# EAGLE board iv25&power-center (EAGLE 7.3.0)
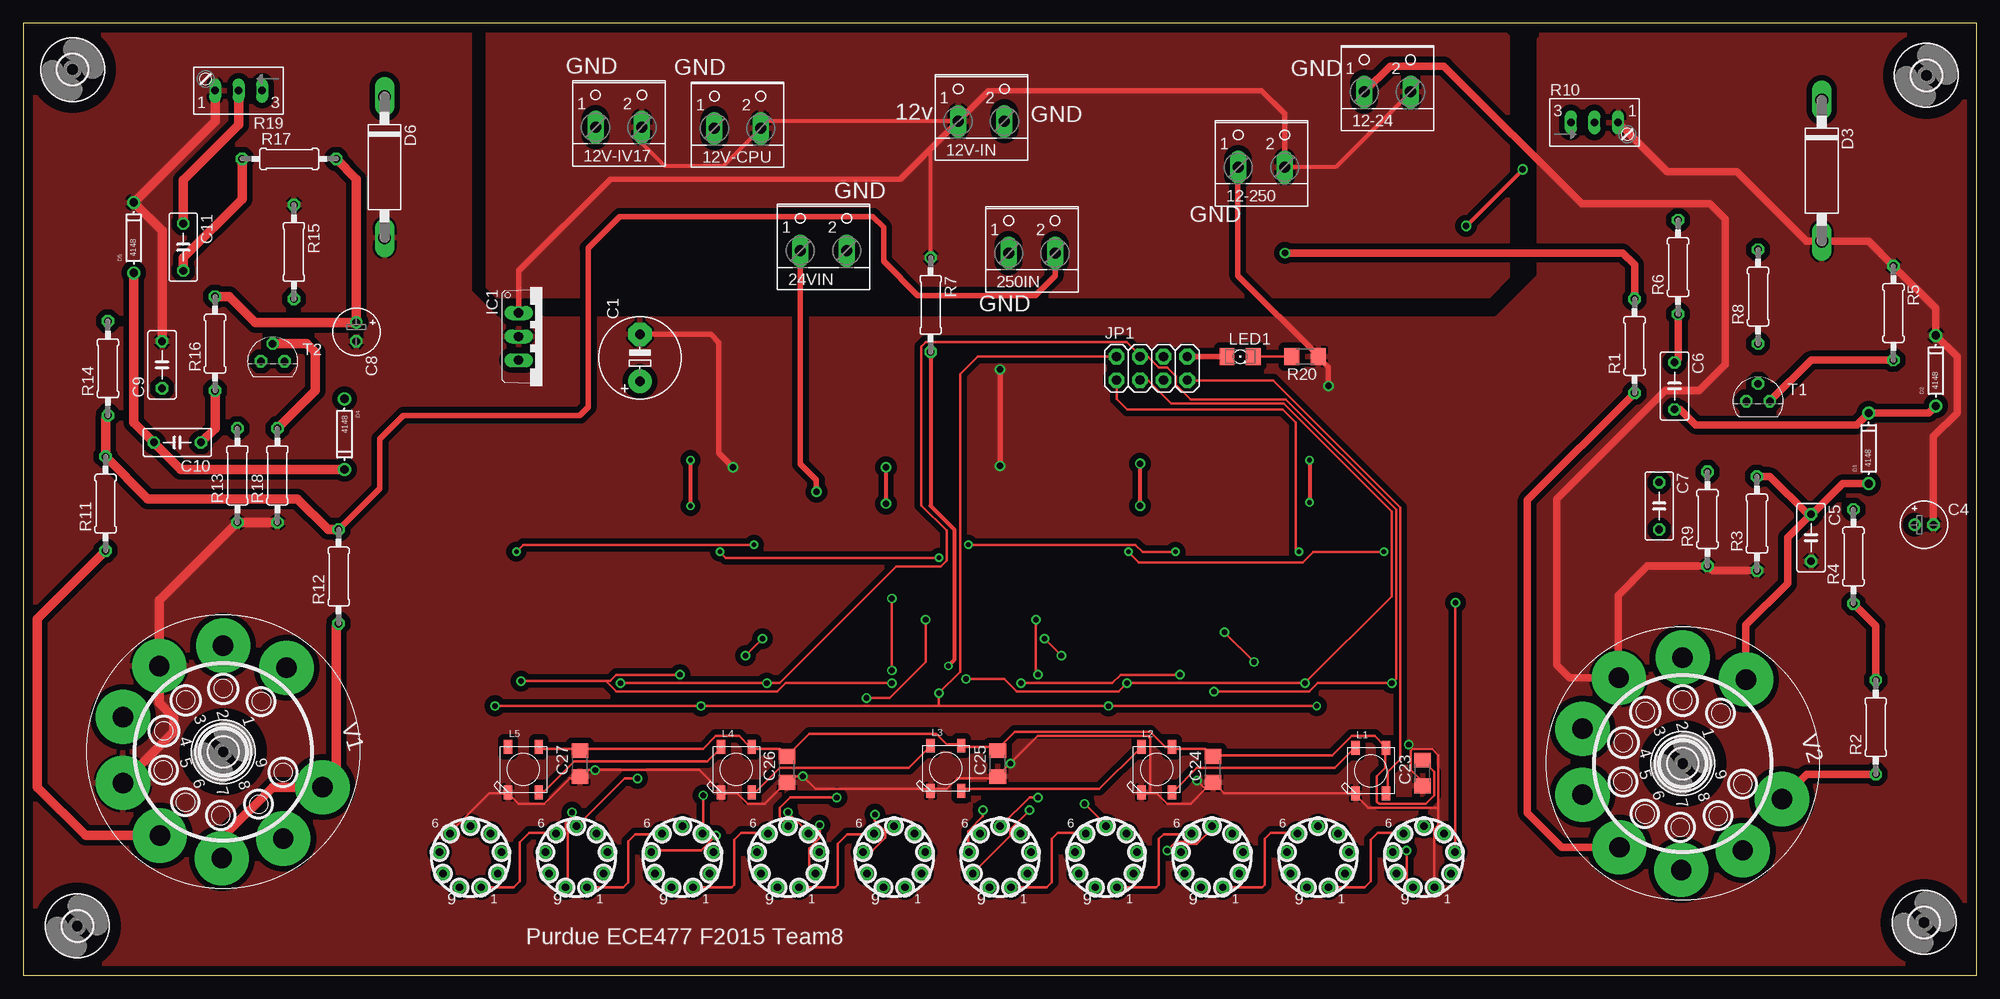
[diagram p0: board, top side]
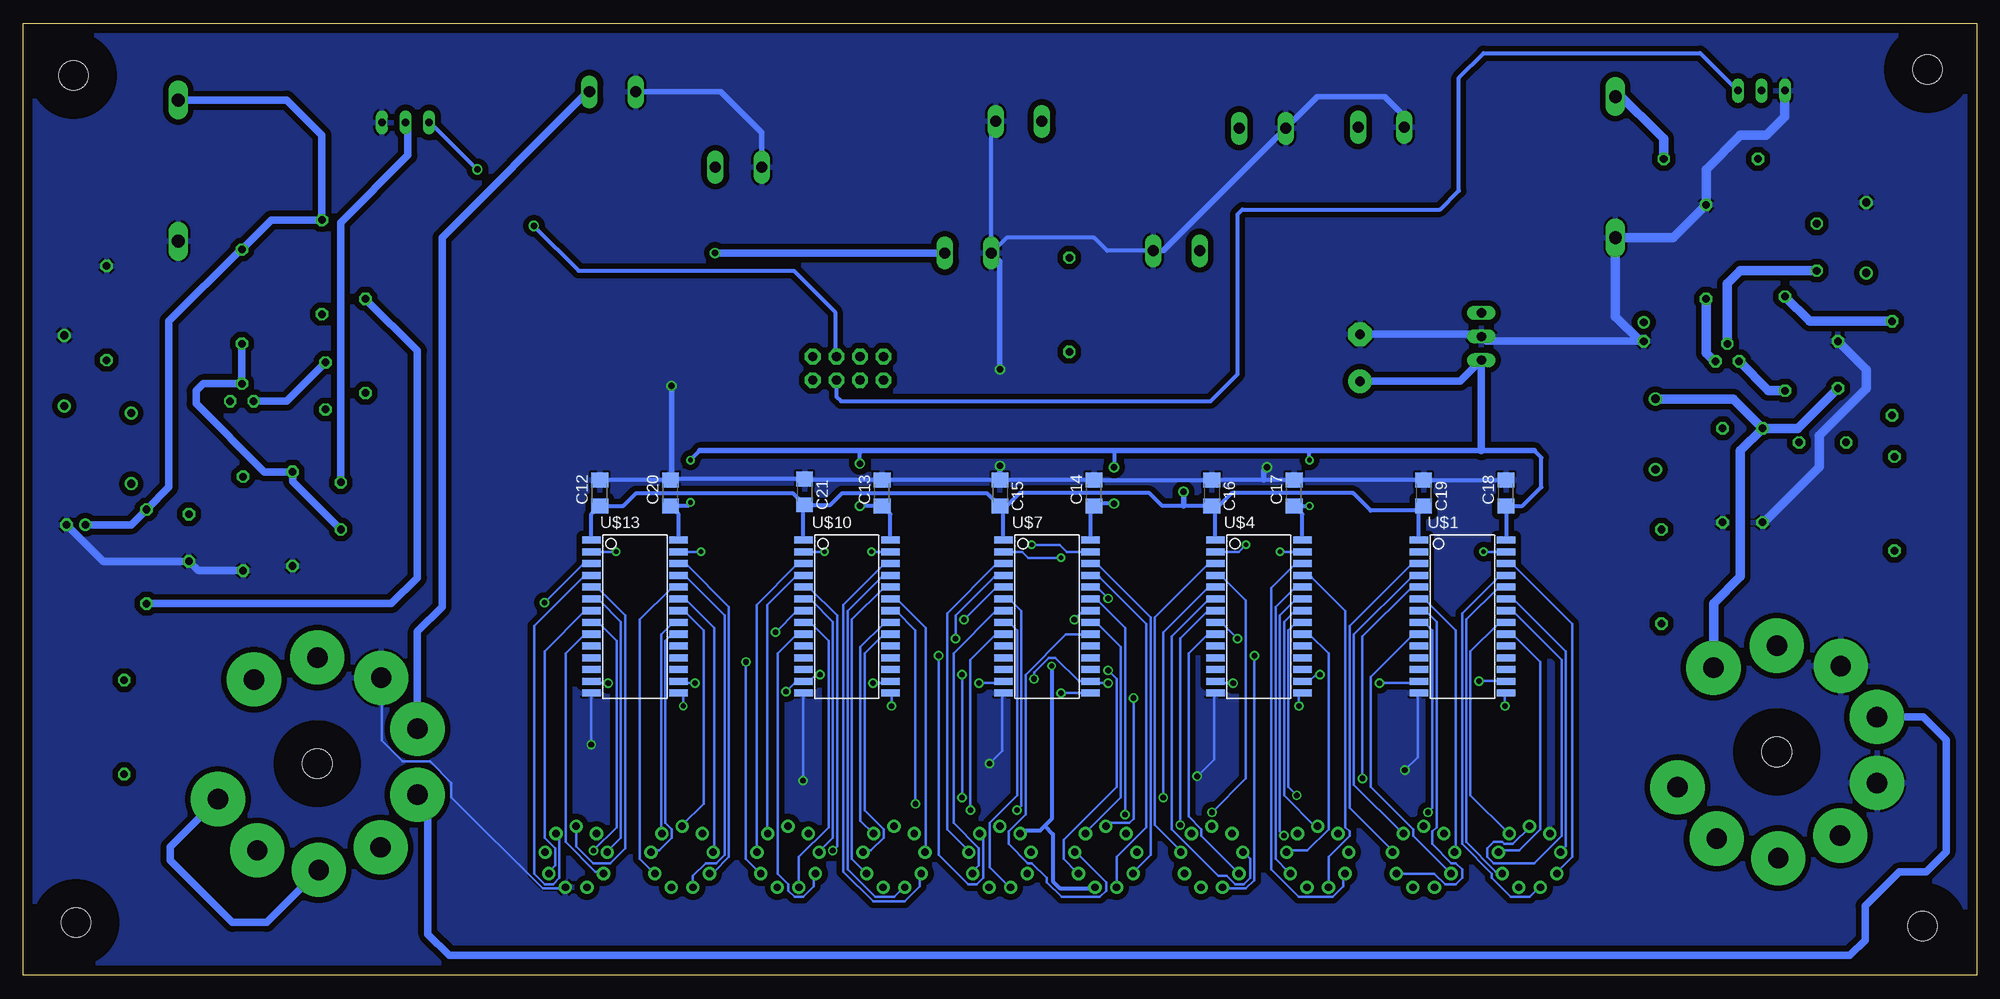
[diagram p1: board, bottom side, seen from below]

Size 210.8 x 102.79 mm. Coordinates in mm from the lower left corner, seen from the top.
Outline: 0,0 210.8,0 210.8,102.79 0,102.79 0,0
Copper layers (1*16): Top 0.035mm / dielectric 1.5mm / Bottom 0.035mm
Design rules "default": minimum track width 10mil, minimum drill 24mil, track to track 8mil, track to pad 8mil, pad to pad 8mil, via to via 8mil, smd to smd 8mil, copper to edge 40mil, drill to drill 8mil, minimum pad ring 10mil, minimum via ring 8mil, stop-mask expansion 4mil, vias tented up to drill 0mil, thermal gap 10mil

## Footprints (pad centres in the part's own frame; a part is rotated, then mirrored left to right if it is on the bottom)
W237-102 = drill 1.194 long: 1 -2.5,-1.27; 2 2.5,-1.27
E5-8,5 = drill 1.016 pad 2.54: + -2.54,0 | drill 1.016 pad 2.54 octagon: - 2.54,0
E2-5 = drill 0.813 pad 1.27: + -1.016,0 | drill 0.813 pad 1.27 octagon: - 1.016,0
C050-030X075 = drill 0.813 octagon: 1 -2.54,0; 2 2.54,0
C1206 = smd 1.6 x 1.8: 1 -1.4,0; 2 1.4,0
DO-1N4148 = drill 0.9: A -3.81,0; C 3.81,0
C1702-15 = drill 1.397 long: A 7.62,0; C -7.62,0
TO220V = drill 1.016 long: 1 -2.54,-2.54; 2 0,-2.54; 3 2.54,-2.54
2X04 = drill 1.016 pad 1.676 octagon: 1 -3.81,-1.27; 2 -3.81,1.27; 3 -1.27,-1.27; 4 -1.27,1.27; 5 1.27,-1.27; 6 1.27,1.27; 7 3.81,-1.27; 8 3.81,1.27
WS2812B = smd 1.5 x 0.9: 1-VDD 2.45,-1.65; 2-DOUT 2.45,1.65; 3-GND -2.45,1.65; 4-DIN -2.45,-1.65
1206 = smd 1.6 x 1.803: A -1.422,0; C 1.422,0
0207/10 = drill 0.813 octagon: 1 -5.08,0; 2 5.08,0
S64W = drill 0.813 long: A 2.54,1.27; E -2.54,1.27; S 0,1.27
R1206 = smd 1.6 x 1.803: 1 -1.422,0; 2 1.422,0
TO92 = drill 0.813 octagon: 1 1.27,0; 2 0,1.905; 3 -1.27,0
SOIC-28W = smd 0.762 x 2: 1 -8.89,-4.7; 2 -7.62,-4.7; 3 -6.35,-4.7; 4 -5.08,-4.7; 5 -3.81,-4.7; 6 -2.54,-4.7; 7 -1.27,-4.7; 8 0,-4.7; 9 1.27,-4.7; 10 2.54,-4.7; 11 3.81,-4.7; 12 5.08,-4.7; 13 6.35,-4.7; 14 7.62,-4.7; 15 7.62,4.7; 16 6.35,4.7; 17 5.08,4.7; 18 3.81,4.7; 19 2.54,4.7; 20 1.27,4.7; 21 0,4.7; 22 -1.27,4.7; 23 -2.54,4.7; 24 -3.81,4.7; 25 -5.08,4.7; 26 -6.35,4.7; 27 -7.62,4.7; 28 -8.89,4.7
NIXIE-9 = drill 0.8 pad 1.422: 1 1.164,-3.197; 2 2.947,-1.701; 3 3.351,0.591; 4 2.187,2.607; 5 0,3.403; 6 -2.187,2.607; 7 -3.351,0.591; 8 -2.947,-1.701; 9 -1.164,-3.197
3,2 = hole 3.2: 0,0
NOVAL = drill 2.2 pad 5.842: 1 6.682,-9.176; 2 10.961,-3.335; 3 10.884,3.896; 4 6.763,9.239; 5 -0.047,11.334; 6 -6.646,9.182; 7 -10.936,3.508; 8 -10.847,-3.457; 9 -6.788,-9.12

## Placement (x,y rotation side)
12-24  [W237-102]  147.19,96.65 0 top
12-250  [W237-102]  133.6,88.52 0 top
12V-CPU  [W237-102]  77.09,92.71 0 top
12V-IN  [W237-102]  103.38,93.47 0 top
12V-IV17  [W237-102]  64.26,92.84 0 top
24VIN  [W237-102]  86.36,79.5 0 top
250IN  [W237-102]  108.84,79.25 0 top
C1  [E5-8,5]  66.55,66.67 90 top
C4  10uf/35v  [E2-5]  205.1,48.64 0 top
C5  100NF  [C050-030X075]  192.91,47.24 270 top
C6  100NF  [C050-030X075]  178.18,63.63 270 top
C7  100NF  [C050-030X075]  176.53,50.67 270 top
C8  10uf/35v  [E2-5]  35.94,69.47 270 top
C9  100NF  [C050-030X075]  14.99,65.91 90 top
C10  100NF  [C050-030X075]  16.64,57.53 180 top
C11  100NF  [C050-030X075]  17.27,78.61 270 top
C12  100nf  [C1206]  148.59,52.07 90 bottom
C13  100nf  [C1206]  118.11,52.07 90 bottom
C14  100nf  [C1206]  95.25,52.07 90 bottom
C15  100nf  [C1206]  105.41,52.07 270 bottom
C16  100nf  [C1206]  82.55,52.07 270 bottom
C17  100nf  [C1206]  73.66,52.07 90 bottom
C18  100nf  [C1206]  50.8,52.07 90 bottom
C19  100nf  [C1206]  59.69,52.07 270 bottom
C20  100nf  [C1206]  140.97,52.07 90 bottom
C21  100nf  [C1206]  126.49,52.2 270 bottom
C23  [C1206]  151,21.84 90 top
C24  [C1206]  128.4,22.23 90 top
C25  [C1206]  105.16,22.86 90 top
C26  [C1206]  82.42,22.23 90 top
C27  [C1206]  60.07,22.86 90 top
D1  4148  [DO-1N4148]  199.14,56.9 90 top
D2  4148  [DO-1N4148]  206.38,65.28 90 top
D3  Z-30V  [C1702-15]  194.06,86.87 270 top
D4  4148  [DO-1N4148]  34.67,58.42 270 top
D5  4148  [DO-1N4148]  11.94,79.63 90 top
D6  Z-30V  [C1702-15]  38.99,87.25 270 top
IC1  7805TV  [TO220V]  56.01,68.96 270 top
JP1  [2X04]  121.79,65.53 0 top
L1  WS2812B  [WS2812B]  145.41,22.1 90 top
L2  WS2812B  [WS2812B]  122.3,22.23 90 top
L3  WS2812B  [WS2812B]  99.57,22.35 90 top
L4  WS2812B  [WS2812B]  76.96,22.23 90 top
L5  WS2812B  [WS2812B]  53.98,22.23 90 top
LED1  [1206]  131.32,66.8 0 top
R1  10k  [0207/10]  173.86,67.94 90 top
R2  470k  [0207/10]  199.9,26.8 90 top
R3  1M  [0207/10]  187.07,48.77 90 top
R4  100k/1w  [0207/10]  197.49,45.21 90 top
R5  2.7K  [0207/10]  201.8,71.5 270 top
R6  47K  [0207/10]  178.56,76.45 90 top
R7  20ohm  [0207/10]  97.92,72.39 270 top
R8  1M  [0207/10]  187.2,73.28 90 top
R9  56K  [0207/10]  181.74,49.28 90 top
R10  100K  [S64W]  169.54,90.81 0 top
R11  10k  [0207/10]  8.89,50.93 90 top
R12  470k  [0207/10]  34.04,43.05 90 top
R13  1M  [0207/10]  23.11,53.98 90 top
R14  100k/1w  [0207/10]  9.14,65.53 90 top
R15  2.7K  [0207/10]  29.21,78.11 270 top
R16  47K  [0207/10]  20.7,68.2 90 top
R17  1M  [0207/10]  28.7,88.14 0 top
R18  56K  [0207/10]  27.43,53.98 90 top
R19  100K  [S64W]  23.24,96.77 180 top
R20  [R1206]  138.3,66.8 180 top
T1  BC546  [TO92]  187.2,61.98 0 top
T2  BC546  [TO92]  26.92,66.29 0 top
U$1  MAX6921  [SOIC-28W]  55.5,38.1 270 bottom
U$2  IV25  [NIXIE-9]  48.26,12.7 0 top
U$3  IV25  [NIXIE-9]  59.69,12.7 0 top
U$4  MAX6921  [SOIC-28W]  77.47,38.1 270 bottom
U$5  IV25  [NIXIE-9]  71.12,12.7 0 top
U$6  IV25  [NIXIE-9]  82.55,12.7 0 top
U$7  MAX6921  [SOIC-28W]  100.33,38.1 270 bottom
U$8  IV25  [NIXIE-9]  93.98,12.7 0 top
U$9  IV25  [NIXIE-9]  105.41,12.7 0 top
U$10  MAX6921  [SOIC-28W]  121.92,38.1 270 bottom
U$11  IV25  [NIXIE-9]  116.84,12.7 0 top
U$12  IV25  [NIXIE-9]  128.27,12.7 0 top
U$13  MAX6921  [SOIC-28W]  144.78,38.1 270 bottom
U$14  IV25  [NIXIE-9]  139.7,12.7 0 top
U$15  IV25  [NIXIE-9]  151.13,12.7 0 top
U$16  [3,2]  5.84,5.33 0 top
U$17  [3,2]  5.33,97.79 0 top
U$18  [3,2]  205.36,97.16 0 top
U$19  [3,2]  205.1,5.71 0 top
U$20  [3,2]  21.59,24.13 0 top
U$21  [3,2]  179.07,22.86 0 top
V1  [NOVAL]  21.59,24.13 107 top
V2  [NOVAL]  179.07,22.86 107 top

## Library data of the parts
12-24 12-250 12V-CPU 12V-IN 12V-IV17 24VIN 250IN = con-wago-500; MPN: 237-102; OC_FARNELL: unknown; OC_NEWARK: 70K9898
C1 C4-C21 C23-C27 R1-R9 R11-R18 R20 = rcl
D1 D2 D4 D5 JP1 L1-L5 LED1 U$1 U$4 U$7 U$10 U$13 = adafruit
D3 D6 = diode
IC1 = linear
R10 R19 = pot
T1 T2 = transistor
U$2 U$3 U$5 U$6 U$8 U$9 U$11 U$12 U$14 U$15 = XXXXXXtube supl
U$16-U$21 = holes
V1 V2 = tubes

## Nets
5VDC: C1.+ C13.1 C14.1 C17.1 C18.1 C20.1 IC1.3 U$1.28 U$4.28 U$7.28 U$10.28 U$13.28
12VDC: 12-24.2 12-250.2 12V-CPU.2 12V-IN.1 12V-IV17.2 IC1.1 R7.1 V2.4
24VDC: 24VIN.1 C12.1 C15.2 C16.2 C19.2 C21.2 U$1.1 U$4.1 U$7.1 U$10.1 U$13.1
+5V: C23.2 C24.2 C25.2 C26.2 C27.2 L1.1-VDD L2.1-VDD L3.1-VDD L4.1-VDD L5.1-VDD
AGND: 12-24.1 12-250.1 12V-CPU.1 12V-IN.2 12V-IV17.1 24VIN.2 250IN.1 C1.- C4.- C5.2 C8.- C9.2 C12.2 C13.2 C14.2 C15.1 C16.1 C17.2 C18.2 C19.1 C20.2 C21.1 C23.1 C24.1 C25.1 C26.1 C27.1 D2.C D3.A D5.C D6.A IC1.2 L1.3-GND L2.3-GND L3.3-GND L4.3-GND L5.3-GND R3.1 R5.1 R9.1 R10.A R13.1 R15.1 R18.1 R19.A R20.1 U$1.14 U$2.6 U$4.14 U$7.14 U$10.14 U$13.14 U$15.1 V1.3 V1.5 V2.3
AUDIO-L: JP1.5 R19.E
AUDIO-R: JP1.6 R10.E
BLANK: JP1.4 U$1.13 U$4.13 U$7.13 U$10.13 U$13.13
CLOCK: JP1.2 U$1.15 U$4.15 U$7.15 U$10.15 U$13.15
DATA: JP1.1 U$13.27
LED-DATA: JP1.7 L1.4-DIN
LOAD: JP1.3 U$1.16 U$4.16 U$7.16 U$10.16 U$13.16
N$1: U$1.24 U$2.2
N$2: U$1.20 U$2.3
N$3: U$1.21 U$2.4
N$4: U$1.22 U$2.5
N$5: U$1.23 U$2.7
N$6: U$1.26 U$2.8
N$7: U$1.25 U$2.9
N$8: U$1.7 U$3.2
N$9: U$1.3 U$3.3
N$10: U$1.4 U$3.4
N$11: U$1.5 U$3.5
N$12: U$1.6 U$3.7
N$13: U$1.9 U$3.8
N$14: U$1.8 U$3.9
N$15: L1.2-DOUT L2.4-DIN
N$16: U$4.24 U$5.2
N$17: LED1.C R20.2
N$18: U$4.20 U$5.3
N$19: U$4.21 U$5.4
N$20: U$4.22 U$5.5
N$21: U$4.23 U$5.7
N$22: U$4.26 U$5.8
N$23: U$4.25 U$5.9
N$24: U$4.7 U$6.2
N$25: U$4.3 U$6.3
N$26: U$4.4 U$6.4
N$27: U$4.5 U$6.5
N$28: U$4.6 U$6.7
N$29: U$4.9 U$6.8
N$30: U$4.8 U$6.9
N$31: U$7.24 U$8.2
N$32: U$7.20 U$8.3
N$33: L2.2-DOUT L3.4-DIN
N$34: U$7.21 U$8.4
N$35: U$7.22 U$8.5
N$36: U$1.27 U$4.2
N$37: U$7.23 U$8.7
N$38: U$7.26 U$8.8
N$39: U$7.25 U$8.9
N$40: U$7.7 U$9.2
N$41: U$7.3 U$9.3
N$42: U$7.4 U$9.4
N$43: U$7.5 U$9.5
N$44: U$7.6 U$9.7
N$45: U$7.9 U$9.8
N$46: U$7.8 U$9.9
N$47: U$10.24 U$11.2
N$48: U$10.20 U$11.3
N$49: U$10.21 U$11.4
N$50: U$10.22 U$11.5
N$51: L3.2-DOUT L4.4-DIN
N$52: U$10.23 U$11.7
N$53: U$10.26 U$11.8
N$54: U$4.27 U$7.2
N$55: U$10.25 U$11.9
N$56: U$10.7 U$12.2
N$57: U$10.3 U$12.3
N$58: U$10.4 U$12.4
N$59: U$10.5 U$12.5
N$60: U$10.6 U$12.7
N$61: U$10.9 U$12.8
N$62: U$10.8 U$12.9
N$63: U$13.24 U$14.2
N$64: U$13.20 U$14.3
N$65: U$13.21 U$14.4
N$66: U$13.22 U$14.5
N$67: U$13.23 U$14.7
N$68: U$13.26 U$14.8
N$69: L4.2-DOUT L5.4-DIN
N$70: U$13.25 U$14.9
N$71: U$13.7 U$15.2
N$72: U$13.3 U$15.3
N$73: U$13.4 U$15.4
N$74: U$13.5 U$15.5
N$75: U$13.6 U$15.7
N$76: U$13.9 U$15.8
N$77: U$13.8 U$15.9
N$78: U$2.1 U$3.6
N$79: U$3.1 U$5.6
N$80: U$5.1 U$6.6
N$81: U$6.1 U$8.6
N$82: U$14.1 U$15.6
N$83: U$12.1 U$14.6
N$84: U$11.1 U$12.6
N$85: U$9.1 U$11.6
N$86: R7.2 U$8.1 U$9.6
N$87: C10.2 D4.C D5.A
N$88: C6.2 D1.C D2.A
N$96: C6.1 R6.1 T1.3
N$97: V1.4 V2.5
N$98: R2.1 V2.7 V2.9
N$100: R1.1 V2.6
N$101: C5.1 D1.A R3.2 V2.1
N$102: C4.+ D3.C R4.2 R6.2 R8.2
N$103: R5.2 T1.1
N$104: 250IN.2 R1.2 R2.2 R4.1 R11.2 R12.2 R14.1
N$105: R12.1 V1.7 V1.9
N$106: R11.1 V1.6
N$107: C7.2 R8.1 R9.2 T1.2
N$108: C9.1 D4.A R13.2 V1.1
N$110: C7.1 R10.S
N$112: C8.+ D6.C R14.2 R16.2 R17.2
N$113: C10.1 R16.1 T2.3
N$114: R15.2 T2.1
N$115: C11.2 R17.1 R18.2 T2.2
N$117: C11.1 R19.S
N$122: U$10.27 U$13.2
N$123: U$7.27 U$10.2
N$124: JP1.8 LED1.A

## Tracks (layer width: path | path; a pad name or v marks a point on that pad's centre or on a via)
5VDC  (via drill 0.5, 0.7)
  Top 0.406: v138.81,55.63 v138.81,51.05 | v72.01,50.67 v72.01,55.63 | v120.52,50.67 v120.52,55.24 | v93.09,54.86 v93.09,50.93
  Bottom 0.406: U$13.28 140.08,49.78 C20.1 139.06,50.67 138.81,50.93 v138.81,51.05 | U$10.28 117.22,49.78 C13.1 v120.52,50.67 | U$7.28 95.63,50.29 C14.1 94.99,50.93 v93.09,50.93 | U$4.28 72.77,49.78 C17.1 v72.01,50.67 | U$1.28 C18.1 49.02,50.67 46.99,52.7 46.99,55.88 47.75,56.64 | 137.79,56.64 v138.81,55.63 | v72.01,55.63 72.01,56.64 | v120.52,55.24 120.52,56.39 120.78,56.64 | 93.09,56.64 v93.09,54.86
  Bottom 0.61: 47.75,56.64 53.47,56.64 72.01,56.64 93.09,56.64 120.78,56.64 137.79,56.64
  Bottom 0.813: C1.+ 55.75,64.14 IC1.3 53.47,56.64
12VDC
  Top 0.406: R7.1 97.92,89.24 12V-IN.1 80.35,92.2 12V-CPU.2 79.59,91.4 75.56,87.38 69.22,87.38 66.8,89.79 66.8,91.53 12V-IV17.2 | 12-24.2 149.69,95.34 141.6,87.25 12-250.2
  Top 0.61: IC1.1 53.47,76.07 63.37,85.98 94.66,85.98 12V-IN.1 104.18,95.5 133.6,95.5 136.1,93 12-250.2
  Bottom 0.813: V2.4 168.26,37.1 165.61,39.75 165.61,79.63 150.24,95 150.07,95 12-24.2
  pour Top (isolate 0.61): 50.16,102.74 50.16,74.42 51.18,73.41 158.12,73.41 160.15,75.44 160.15,101.35 158.62,102.87 50.29,102.87
24VDC  (via drill 0.7)
  Top 0.61: 24VIN.1 83.86,55.2 85.6,53.47 v85.6,52.2
  Bottom 0.406: U$1.1 60.2,50.16 | 60.2,50.16 C19.2 | U$4.1 82.17,50.29 | 82.17,50.29 C16.2 85.6,50.67 87.88,50.67 89.28,52.07 103.25,52.07 105.03,50.29 | U$7.1 105.03,50.29 | 105.03,50.29 C15.2 106.81,52.07 122.43,52.07 123.7,50.8 C21.2 | U$10.1 126.62,50.67 C21.2 | U$13.1 149.48,49.78 C12.1 146.05,50.67 144.65,52.07 127.77,52.07 C21.2 | 60.2,50.16 65.4,50.16 67.31,52.07 80.39,52.07 82.17,50.29
  Bottom 0.61: v85.6,52.2 85.6,50.67
+5V
  Top 0.254: C23.2 151.1,23.09 152.25,21.95 152.25,19.43 151.33,18.52 146.3,18.52 146.07,18.75 146.07,21.49 146.99,22.4 146.99,24.46 L1.1-VDD 146.99,24.69 145.85,25.83 143.33,25.83 141.28,23.77 128.47,23.77 C24.2 128.25,23.77 127.56,24.46 124.13,24.46 L2.1-VDD 123.9,24.69 123.22,24.69 121.61,26.29 106.98,26.29 105.16,24.46 | L5.1-VDD 55.78,24.46 59.89,24.46 C27.2 60.12,24.46 73.38,24.46 74.75,25.83 77.27,25.83 78.41,24.69 L4.1-VDD 78.64,24.46 81.61,24.46 82.3,23.77 C26.2 82.53,23.77 84.81,26.06 98.53,26.06 99.67,24.92 101.04,24.92 L3.1-VDD 101.27,24.69 104.93,24.69 105.16,24.46 | 105.16,24.46 C25.2
AGND  (via drill 0.61, 0.7)
  Top 0.254: 149.96,24.46 149.73,24.23 149.73,22.17 150.88,21.03 150.88,20.57 C23.1 | 149.96,24.46 152.02,24.46 152.71,23.77 152.71,18.06 | 152.71,18.06 152.71,16.23 152.25,15.77 152.25,9.6 U$15.1 | 149.96,24.46 v149.5,24.92 | 121.61,19.66 122.3,19.66 123.44,18.52 125.96,18.52 127.56,20.12 | 121.61,19.66 120.7,19.66 L2.3-GND | 127.56,20.12 128.25,20.8 C24.1 | C24.1 128.47,20.8 129.62,19.66 143.56,19.66 L1.3-GND 143.79,19.43 145.16,18.06 152.71,18.06 | 127.56,20.12 v126.64,21.03 | 127.56,20.12 C24.1 | U$2.6 45.95,15.32 50.29,19.66 52.12,19.66 L5.3-GND 52.35,19.66 53.49,18.52 56.24,18.52 58.98,21.26 59.89,21.26 C27.1 60.12,21.49 60.81,22.17 v61.72,22.17 72.92,22.17 75.21,19.89 L4.3-GND 75.44,19.66 77.04,19.66 78.18,18.52 80.01,18.52 82.3,20.8 C26.1 82.53,21.03 82.98,21.49 v84.12,21.49 85.5,20.12 97.84,20.12 L3.3-GND 98.07,20.12 99.67,20.12 100.81,21.26 105.16,21.26 C25.1 105.16,21.49 v106.53,22.86 109.5,25.83 121.39,25.83 121.61,25.6 121.61,19.66
  Top 0.406: R20.1 139.72,66.9 | 131.06,87.21 12-250.1
  Top 0.61: 139.72,66.9 131.06,75.56 131.06,87.21 | v105.41,54.99 v105.41,65.41 | v76.58,54.86 75.06,56.39 75.06,68.33 74.17,69.22 C1.- | v140.84,63.63 140.84,65.68 R20.1
  Top 0.813: C4.- 206.12,58.17 208.66,60.71 208.66,66.8 D2.C 206.38,72.01 R5.1 199.14,79.25 D3.A 192.41,79.25 184.91,86.74 177.42,86.74 R10.A | R3.1 182.25,43.69 R9.1 175.26,44.2 172.09,41.02 172.09,32.21 V2.3 166.88,32.13 165.48,33.53 165.48,51.44 177.16,63.12 180.85,63.12 183.64,65.91 183.64,81.66 181.99,83.31 168.15,83.31 153.29,98.17 147.49,98.17 12-24.1
  Top 1.016: R18.1 R13.1 14.68,40.46 V1.3 14.68,29.39 16.26,27.81 16.26,26.26 V1.5 | R19.A 20.7,92.2 D5.C 14.99,80.39 C9.2
  Bottom 0.254: v149.5,24.92 149.5,30.4 U$13.14 | v126.64,21.03 126.64,30.4 U$10.14 | v61.72,22.17 60.35,23.55 60.35,30.4 U$1.14 | v106.53,22.86 105.16,24.23 105.16,30.4 U$7.14 | v84.12,21.49 82.3,23.32 82.3,30.4 U$4.14 | U$15.1 152.48,9.37 154.76,9.37 164.59,19.2 164.59,20.8 166.88,23.09 169.85,23.09 172.14,25.38 172.14,32 V2.3
  Bottom 0.406: C18.2 C19.1 C17.2 76.92,53.47 C16.1 C14.2 C15.1 C13.2 | C13.2 118.49,53.47 118.87,53.85 118.49,53.85 C13.2 | C13.2 126.36,53.47 C21.1 140.84,53.6 C20.2 C12.2 | 24VIN.2 93.85,78.23 95.25,79.63 104.69,79.63 250IN.1 106.34,91.74 12V-IN.2
  Bottom 0.61: C15.1 v105.41,54.99 | v105.41,65.41 105.41,77.05 250IN.1 | 76.92,53.47 76.92,54.52 v76.58,54.86 | 24VIN.2 87.8,78.23 12V-CPU.1 71.16,94.87 63.88,94.87 61.76,92.75 12V-IV17.1 | 140.84,53.6 v140.84,63.63 | 12-250.1 131.1,90.97 135.51,95.38 12-24.1
  Bottom 0.813: R3.1 191.9,43.69 C5.2 202.18,44.7 C4.- | C8.- 52.96,68.45 IC1.2 53.72,69.22 C1.-
  Bottom 1.016: R19.A 20.7,92.71 22.73,90.68 25.53,90.68 29.21,87 R15.1 32.77,79.63 D6.A 38.99,71.12 36.32,68.45 C8.- | R13.1 22.99,48.9 17.02,54.86 17.02,58.29 11.94,63.37 11.94,65.41 C9.2
  pour Bottom (isolate 0.61): 0,0 0,102.87 210.82,102.87 210.82,0
  pour Top (isolate 0.61): 0,0 0,102.87 0.13,103 46.74,103 48.13,101.6 48.13,73.79 51.05,70.87 159,70.87 163.58,75.44 163.58,100.97 163.83,101.22 163.83,102.87 163.7,103 210.57,103 210.95,102.62 210.95,-0.13 0.13,-0.13
AUDIO-L
  Bottom 0.406: JP1.5 123.06,62.48 122.56,61.98 82.68,61.98 79.76,64.9 79.76,82.17 79.25,82.68 57.91,82.68 55.88,84.71 55.88,96.9 53.21,99.57 29.84,99.57 R19.E
AUDIO-R  (via drill 0.7)
  Top 0.406: v161.8,87 v155.7,80.9
  Bottom 0.406: R10.E 166.88,92.08 v161.8,87 | v155.7,80.9 150.88,76.07 127.64,76.07 123.19,71.63 123.19,66.93 JP1.6
BLANK  (via drill 0.61)
  Top 0.254: v64.47,31.55 v80.24,31.55 81.61,31.55 94.18,44.12 98.98,44.12 99.67,44.81 99.67,48.01 96.93,50.75 96.93,67.89 97.38,68.35 119.1,68.35 120.47,66.98 JP1.4 120.7,66.75 121.39,66.75 122.53,65.61 123.44,65.61 124.36,64.69 124.36,63.78 125.96,62.18 136.25,62.18 148.13,50.29 148.13,32 v147.68,31.55 139.68,31.55 138.76,30.63 v128.47,30.63 | v107.67,31.55 117.5,31.55 118.42,32.46 v124.82,32.46
  Bottom 0.254: v64.47,31.55 60.35,31.55 U$1.13 | v80.24,31.55 82.07,31.55 U$4.13 | v107.67,31.55 105.16,31.55 U$7.13 | v124.82,32.46 125.27,32.46 125.96,31.77 126.42,31.77 U$10.13 126.64,31.55 127.56,31.55 v128.47,30.63 | v147.68,31.55 149.28,31.55 U$13.13
CLOCK  (via drill 0.5, 0.6)
  Top 0.254: JP1.2 103,66.8 101.09,64.9 101.09,32.77 v98.81,30.48 98.81,29.21 98.68,29.08 | 98.68,29.08 v117.09,29.08 v139.57,29.08 | 98.68,29.08 v73.15,29.08 v50.93,29.08
  Bottom 0.254: v98.81,30.48 U$7.15 | v73.15,29.08 73.15,30.1 U$4.15 | v50.93,29.08 50.93,30.35 U$1.15 | v117.09,29.08 117.09,30.35 U$10.15 | v139.57,29.08 139.57,30.23 139.83,30.23 U$13.15
DATA  (via drill 0.5)
  Top 0.254: JP1.1 117.98,62.23 119.13,61.09 135.89,61.09 137.29,59.69 137.29,46.1 v137.67,45.72
  Bottom 0.254: v137.67,45.72 U$13.27
LED-DATA
  Top 0.254: L1.4-DIN 147.22,19.66 147.22,21.95 148.59,23.32 148.59,50.52 134.87,64.24 125.73,64.24 JP1.7
LOAD  (via drill 0.61)
  Top 0.254: 62.87,31.77 63.32,31.77 64.01,32.46 v70.87,32.46 | 62.87,31.77 v53.72,31.77 | v93.73,31.55 82.3,31.55 81.38,30.63 64.01,30.63 62.87,31.77 | JP1.3 120.7,64.24 121.39,64.24 123.9,61.72 136.02,61.72 147.68,50.06 147.68,40.92 v138.3,31.55 v119.1,31.55 118.19,30.63 107.21,30.63 105.84,32 v101.73,32
  Bottom 0.254: v53.72,31.77 50.98,31.77 U$1.16 | v70.87,32.46 71.32,32.46 72.01,31.77 72.69,31.77 U$4.16 | v93.73,31.55 95.56,31.55 U$7.16 95.78,31.77 96.93,31.77 99.44,34.29 100.13,34.29 101.73,32.69 v101.73,32 | v119.1,31.55 117.27,31.55 U$10.16 | v138.3,31.55 139.9,31.55 U$13.16
N$1
  Bottom 0.254: U$1.24 50.98,41.83 51.66,41.83 55.09,38.41 55.09,14.4 51.89,11.2 51.44,11.2 U$2.2
N$2
  Bottom 0.254: U$1.20 50.75,36.8 50.06,36.8 47.09,33.83 47.09,15.77 49.38,13.49 51.44,13.49 U$2.3
N$3
  Bottom 0.254: U$1.21 50.98,37.95 51.66,37.95 54.63,34.98 54.63,19.43 50.52,15.32 U$2.4
N$4
  Bottom 0.254: U$1.22 50.75,39.32 50.06,39.32 44.81,34.06 44.81,15.09 47.78,12.12 52.12,12.12 52.81,12.8 52.81,13.72 52.12,14.4 51.21,14.4 50.98,14.17 50.06,14.17 48.23,16 U$2.5
N$5
  Bottom 0.254: U$1.23 50.75,40.46 49.84,40.46 44.35,34.98 44.35,13.95 44.81,13.49 U$2.7
N$6
  Bottom 0.254: U$1.26 50.75,44.35 50.06,44.35 43.66,37.95 43.66,12.8 45.26,11.2 U$2.8
N$7
  Bottom 0.254: U$1.25 50.98,42.98 51.66,42.98 55.55,39.09 55.55,14.17 52.35,10.97 52.35,10.52 50.29,8.46 48.23,8.46 47.32,9.37 U$2.9
N$8
  Bottom 0.254: U$1.7 60.12,39.32 59.44,39.32 58.29,38.18 58.29,16 58.75,15.54 58.75,14.17 56.69,12.12 56.24,12.12 55.55,11.43 55.55,10.52 56.24,9.83 57.38,9.83 58.52,10.97 62.64,10.97 U$3.2
N$9
  Bottom 0.254: U$1.3 60.35,44.35 61.04,44.35 67.67,37.72 67.67,18.06 63.09,13.49 U$3.3
N$10
  Bottom 0.254: U$1.4 60.35,42.98 61.04,42.98 67.21,36.8 67.21,20.57 61.95,15.32 U$3.4
N$11  (via drill 0.61)
  Top 0.254: v66.29,21.26 64.92,21.26 59.89,16.23 U$3.5
  Bottom 0.254: v66.29,21.26 66.29,36.58 61.04,41.83 60.35,41.83 U$1.5
N$12
  Bottom 0.254: U$1.6 60.12,40.46 59.44,40.46 56.24,37.26 56.24,13.49 U$3.7
N$13
  Bottom 0.254: U$1.9 60.35,36.8 60.81,36.8 65.38,32.23 65.38,20.34 60.81,15.77 60.81,15.09 56.92,11.2 U$3.8
N$14  (via drill 0.61)
  Top 0.254: v59.21,17.6 59.21,17.14 58.52,16.46 58.52,15.77 58.75,15.54 58.75,9.6 U$3.9
  Bottom 0.254: v59.21,17.6 58.75,18.06 58.75,37.26 59.44,37.95 60.12,37.95 U$1.8
N$15
  Top 0.254: L2.4-DIN 124.13,19.89 126.64,22.4 141.5,22.4 143.56,24.46 L1.2-DOUT
N$16
  Bottom 0.254: U$4.24 72.92,41.83 73.61,41.83 75.67,39.78 75.67,12.57 74.3,11.2 U$5.2
N$17
  Top 0.254: LED1.C R20.2
N$18
  Bottom 0.254: U$4.20 72.69,36.8 72.01,36.8 69.95,34.75 69.95,15.77 72.24,13.49 74.3,13.49 U$5.3
N$19  (via drill 0.61)
  Top 0.254: v73.38,19.43 73.38,15.32 U$5.4
  Bottom 0.254: v73.38,19.43 74.3,20.34 74.3,37.26 73.61,37.95 72.92,37.95 U$4.21
N$20
  Bottom 0.254: U$4.22 72.92,39.32 73.61,39.32 74.75,38.18 74.75,19.43 71.32,16 U$5.5
N$21  (via drill 0.61)
  Top 0.254: v74.75,15.09 73.15,13.49 67.89,13.49 U$5.7
  Bottom 0.254: v74.75,15.09 75.21,15.54 75.21,38.86 73.61,40.46 72.92,40.46 U$4.23
N$22
  Bottom 0.254: U$4.26 72.92,44.35 73.61,44.35 76.12,41.83 76.12,11.43 73.15,8.46 69.49,8.46 68.35,9.6 68.35,10.97 U$5.8
N$23
  Bottom 0.254: U$4.25 72.69,42.98 71.78,42.98 68.12,39.32 68.12,16 67.67,15.54 67.67,15.09 69.95,12.8 69.95,9.6 U$5.9
N$24  (via drill 0.61)
  Top 0.254: v85.95,16.23 85.95,14.86 84.81,13.72 84.81,11.89 85.5,11.2 U$6.2
  Bottom 0.254: v85.95,16.23 85.95,36.35 82.98,39.32 82.3,39.32 U$4.7
N$25
  Bottom 0.254: U$4.3 82.3,44.35 82.98,44.35 88.7,38.63 88.7,16.23 85.95,13.49 U$6.3
N$26  (via drill 0.61)
  Top 0.254: v82.53,17.6 84.81,15.32 U$6.4
  Bottom 0.254: v82.53,17.6 78.87,21.26 78.87,40.46 81.38,42.98 82.07,42.98 U$4.4
N$27  (via drill 0.61)
  Top 0.254: v87.78,19.2 82.75,19.2 81.61,18.06 81.61,17.14 82.53,16.23 U$6.5
  Bottom 0.254: v87.78,19.2 87.78,37.03 82.98,41.83 82.3,41.83 U$4.5
N$28
  Bottom 0.254: U$4.6 82.3,40.46 82.98,40.46 86.87,36.58 86.87,15.77 81.84,10.74 80.92,10.74 80.01,9.83 79.1,9.83 78.41,10.52 78.41,12.57 79.1,13.26 U$6.7
N$29
  Bottom 0.254: U$4.9 82.3,36.8 82.98,36.8 85.04,34.75 85.04,17.14 83.67,15.77 83.67,15.09 79.78,11.2 U$6.8
N$30  (via drill 0.61)
  Top 0.254: v77.95,34.52 v79.78,36.35
  Bottom 0.254: v79.78,36.35 81.38,37.95 82.07,37.95 U$4.8 | v77.95,34.52 77.95,10.29 78.87,9.37 81.38,9.37 U$6.9
N$31  (via drill 0.61)
  Top 0.254: v93.73,32.92 v93.73,40.69
  Bottom 0.254: v93.73,40.69 94.87,41.83 95.56,41.83 U$7.24 | v93.73,32.92 92.81,32 92.81,20.34 98.53,14.63 98.53,12.57 97.16,11.2 U$8.2
N$32
  Bottom 0.254: U$7.20 95.78,36.8 98.3,36.8 102.64,32.46 102.64,17.37 104.47,15.54 104.47,14.17 102.41,12.12 101.96,12.12 100.36,10.52 100.36,10.06 98.75,8.46 94.64,8.46 93.95,9.14 93.95,10.06 97.16,13.26 U$8.3
N$33
  Top 0.254: L3.4-DIN 101.27,20.12 116.13,20.12 120.47,24.46 L2.2-DOUT
N$34
  Bottom 0.254: U$7.21 95.56,37.95 94.87,37.95 92.35,35.43 92.35,19.2 96.24,15.32 U$8.4
N$35  (via drill 0.61)
  Top 0.254: v97.38,38.41 97.38,33.83 93.5,29.95 v90.98,29.95
  Bottom 0.254: v97.38,38.41 96.47,39.32 95.78,39.32 U$7.22 | v90.98,29.95 90.98,16.92 91.44,16.46 93.73,16.46 93.95,16.23 U$8.5
N$36  (via drill 0.5)
  Top 0.254: v78.87,46.48 53.98,46.48 v53.21,45.72
  Bottom 0.254: U$4.2 79.63,45.72 v78.87,46.48 | v53.21,45.72 U$1.27
N$37  (via drill 0.61)
  Top 0.254: v91.9,17.37 91.9,16.69 93.04,15.54 93.04,14.86 91.67,13.49 90.75,13.49 U$8.7
  Bottom 0.254: v91.9,17.37 91.9,37.49 94.87,40.46 95.56,40.46 U$7.23
N$38
  Bottom 0.254: U$7.26 95.56,44.35 94.87,44.35 89.15,38.63 89.15,13.03 90.98,11.2 U$8.8
N$39
  Bottom 0.254: U$7.25 95.56,42.98 94.64,42.98 89.61,37.95 89.61,16 92.81,12.8 92.81,9.6 U$8.9
N$40
  Bottom 0.254: U$7.7 105.16,39.32 105.84,39.32 110.41,34.75 110.41,16.46 107.67,13.72 107.67,11.89 108.36,11.2 U$9.2
N$41
  Bottom 0.254: U$7.3 105.16,44.35 105.84,44.35 111.1,39.09 111.1,15.77 108.81,13.49 U$9.3
N$42  (via drill 0.61)
  Top 0.254: v112.01,34.52 v110.19,36.35
  Bottom 0.254: v110.19,36.35 110.19,38.86 106.07,42.98 105.16,42.98 U$7.4 | v112.01,34.52 112.01,13.03 108.81,9.83 107.9,9.83 107.21,10.52 107.21,14.86 107.44,15.09 U$9.4
N$43  (via drill 0.61)
  Top 0.254: v109.27,38.41 109.27,32.69 v109.5,32.46 | v109.5,19.2 108.58,19.2 105.61,16.23 U$9.5
  Bottom 0.254: v109.27,38.41 105.84,41.83 105.16,41.83 U$7.5 | v109.5,19.2 v109.5,32.46
N$44  (via drill 0.61)
  Top 0.254: v103.56,17.83 103.56,17.14 101.96,15.54 101.96,13.49 U$9.7
  Bottom 0.254: v103.56,17.83 103.1,18.29 103.1,39.32 104.24,40.46 104.93,40.46 U$7.6
N$45  (via drill 0.61)
  Top 0.254: v108.58,17.83 106.53,15.77 106.53,15.09 102.64,11.2 U$9.8
  Bottom 0.254: v108.58,17.83 108.58,34.06 105.84,36.8 105.16,36.8 U$7.9
N$46
  Bottom 0.254: U$7.8 104.93,37.95 104.24,37.95 103.56,37.26 103.56,19.43 106.53,16.46 106.53,11.66 104.47,9.6 U$9.9
N$47
  Bottom 0.254: U$10.24 117.27,41.83 117.96,41.83 121.39,38.41 121.39,12.57 120.02,11.2 U$11.2
N$48
  Bottom 0.254: U$10.20 117.27,36.8 117.96,36.8 120.02,34.75 120.02,17.83 117.96,15.77 117.96,14.86 119.33,13.49 120.02,13.49 U$11.3
N$49
  Bottom 0.254: U$10.21 117.27,37.95 117.96,37.95 120.47,35.43 120.47,16.69 119.1,15.32 U$11.4
N$50  (via drill 0.61)
  Top 0.254: v114.53,18.52 116.81,16.23 U$11.5
  Bottom 0.254: v114.53,18.52 114.53,37.26 116.59,39.32 117.04,39.32 U$10.22
N$51
  Top 0.254: L4.4-DIN 78.64,19.89 79.1,19.89 81.61,22.4 95.56,22.4 97.84,24.69 L3.2-DOUT
N$52
  Bottom 0.254: U$10.23 117.04,40.46 116.36,40.46 113.39,37.49 113.39,13.49 U$11.7
N$53
  Bottom 0.254: U$10.26 117.27,44.35 117.96,44.35 122.3,40.01 122.3,11.2 119.1,8 115.67,8 114.07,9.6 114.07,10.97 U$11.8
N$54  (via drill 0.5)
  Top 0.254: v98.81,45.09 75.82,45.09 v75.18,45.72
  Bottom 0.254: U$7.2 103,45.72 102.36,45.09 v98.81,45.09 | v75.18,45.72 U$4.27
N$55
  Bottom 0.254: U$10.25 117.27,42.98 118.19,42.98 121.84,39.32 121.84,11.43 118.87,8.46 116.81,8.46 115.9,9.37 U$11.9
N$56  (via drill 0.61)
  Top 0.254: v132.82,33.83 v129.62,37.03
  Bottom 0.254: v129.62,37.03 127.33,39.32 126.64,39.32 U$10.7 | v132.82,33.83 132.82,12.57 131.44,11.2 U$12.2
N$57
  Bottom 0.254: U$10.3 126.64,44.35 127.33,44.35 131.67,40.01 131.67,13.49 U$12.3
N$58
  Bottom 0.254: U$10.4 126.64,42.98 127.56,42.98 130.53,40.01 130.53,15.32 U$12.4
N$59  (via drill 0.61)
  Top 0.254: v123.44,13.49 124.36,14.4 125.5,14.4 125.73,14.17 126.64,14.17 128.47,16 U$12.5
  Bottom 0.254: v123.44,13.49 122.99,13.95 122.99,38.86 125.96,41.83 126.42,41.83 U$10.5
N$60
  Bottom 0.254: U$10.6 126.42,40.46 125.73,40.46 123.44,38.18 123.44,14.86 124.82,13.49 U$12.7
N$61
  Bottom 0.254: U$10.9 126.64,36.8 127.33,36.8 129.39,34.75 129.39,10.97 128.25,9.83 128.25,9.14 127.56,8.46 126.64,8.46 125.5,9.6 125.5,10.97 U$12.8
N$62
  Bottom 0.254: U$10.8 126.42,37.95 125.73,37.95 123.9,36.12 123.9,16 127.1,12.8 127.1,9.6 U$12.9
N$63
  Bottom 0.254: U$13.24 140.13,41.83 140.82,41.83 144.25,38.41 144.25,12.57 142.88,11.2 U$14.2
N$64
  Bottom 0.254: U$13.20 140.13,36.8 140.82,36.8 141.5,36.12 141.5,16.46 140.82,15.77 140.82,14.86 142.19,13.49 142.88,13.49 U$14.3
N$65
  Bottom 0.254: U$13.21 140.13,37.95 140.82,37.95 141.96,36.8 141.96,15.32 U$14.4
N$66
  Bottom 0.254: U$13.22 139.9,39.32 139.45,39.32 137.39,37.26 137.39,18.52 139.68,16.23 U$14.5
N$67
  Bottom 0.254: U$13.23 139.9,40.46 139.22,40.46 136.25,37.49 136.25,13.49 U$14.7
N$68
  Bottom 0.254: U$13.26 139.9,44.35 139.22,44.35 134.65,39.78 134.65,12.8 136.25,11.2 136.7,11.2 U$14.8
N$69
  Top 0.254: L5.4-DIN 55.78,19.89 56.24,19.89 59.44,23.09 73.84,23.09 75.21,24.46 L4.2-DOUT
N$70
  Bottom 0.254: U$13.25 139.9,42.98 139.22,42.98 135.1,38.86 135.1,13.03 136.02,12.12 137.16,12.12 138.53,10.74 138.53,9.6 U$14.9
N$71
  Bottom 0.254: U$13.7 149.5,39.32 150.19,39.32 154.53,34.98 154.53,14.86 153.39,13.72 153.39,11.89 154.08,11.2 U$15.2
N$72  (via drill 0.61)
  Top 0.254: v154.53,40.23 154.53,13.49 U$15.3
  Bottom 0.254: v154.53,40.23 150.42,44.35 149.5,44.35 U$13.3
N$73
  Bottom 0.254: U$13.4 149.5,42.98 150.42,42.98 155.68,37.72 155.68,10.97 154.53,9.83 153.62,9.83 152.93,10.52 152.93,14.86 153.16,15.09 U$15.4
N$74
  Bottom 0.254: U$13.5 149.28,41.83 148.82,41.83 145.85,38.86 145.85,13.72 147.45,12.12 149.28,12.12 151.1,13.95 151.1,16 U$15.5
N$75
  Bottom 0.254: U$13.6 149.28,40.46 148.59,40.46 146.3,38.18 146.3,14.86 147.68,13.49 U$15.7
N$76
  Bottom 0.254: U$13.9 149.5,36.8 150.19,36.8 152.25,34.75 152.25,14.4 149.05,11.2 148.36,11.2 U$15.8
N$77  (via drill 0.61)
  Top 0.254: v149.28,13.49 149.28,10.29 149.96,9.6 U$15.9
  Bottom 0.254: v149.28,13.49 146.76,16 146.76,36.12 148.59,37.95 149.28,37.95 U$13.8
N$78
  Top 0.254: U$2.1 52.94,9.5 53.59,10.16 53.59,14.35 54.61,15.37 57.44,15.37 U$3.6
N$79
  Top 0.254: U$3.1 64.75,9.5 65.28,10.03 65.28,14.48 66.04,15.24 68.87,15.24 U$5.6
N$80
  Top 0.254: U$5.1 76.43,9.5 76.71,9.78 76.71,14.61 77.47,15.37 80.3,15.37 U$6.6
N$81
  Top 0.254: U$6.1 87.61,9.5 87.88,9.78 87.88,14.22 88.9,15.24 91.73,15.24 U$8.6
N$82
  Top 0.254: U$14.1 144.76,9.5 145.41,10.16 145.41,14.61 146.18,15.37 148.88,15.37 U$15.6
N$83
  Top 0.254: U$12.1 133.71,9.5 133.99,9.78 133.99,14.73 134.62,15.37 137.45,15.37 U$14.6
N$84
  Top 0.254: U$11.1 122.28,9.5 122.56,9.78 122.56,14.73 123.06,15.24 126.02,15.24 U$12.6
N$85
  Top 0.254: U$9.1 110.47,9.5 111,10.03 111,14.73 111.63,15.37 114.59,15.37 U$11.6
N$86  (via drill 0.5)
  Top 0.406: R7.2 97.92,50.67 100.46,48.13 100.46,34.04 v99.82,33.4
  Bottom 0.406: v99.82,33.4 99.82,16.89 100.58,16.13 | 100.58,16.13 101.09,15.62 102.91,15.62 U$9.6 | 100.58,16.13 99.69,15.24 99.69,10.16 98.93,9.4 95.25,9.4 U$8.1
N$87
  Top 1.016: D4.C 17.02,54.61 C10.2 11.94,59.69 D5.A
N$88
  Top 0.813: D2.A 205.61,60.71 D1.C 197.87,59.44 180.47,59.44 178.82,61.09 C6.2
N$96
  Top 0.813: R6.1 178.56,66.55 C6.1
  Bottom 0.813: T1.3 182.37,61.98 C6.1
N$97
  Bottom 0.813: V1.4 5.8,27.9 3.3,25.4 3.3,13.34 5.46,11.18 8.38,11.18 12.06,7.49 12.06,3.81 13.72,2.16 164.85,2.16 167.13,4.45 167.13,18.39 V2.5
N$98
  Top 0.813: R2.1 192.46,21.72 V2.9
  Bottom 0.813: V2.7 178.91,11.33 184.53,5.71 188.21,5.71 194.94,12.45 194.94,13.87 V2.9
N$100
  Top 0.813: V2.6 166.01,13.82 162.31,17.53 162.31,51.31 R1.1
N$101
  Top 0.813: V2.1 185.89,37.81 190.37,42.29 190.37,47.24 C5.1 | C5.1 193.04,49.78 196.34,53.09 D1.A | C5.1 192.53,49.78 188.47,53.85 R3.2
N$102
  Bottom 0.813: D3.C 182.37,94.49 178.56,90.68 R6.2 184.02,81.53 R8.2 187.32,78.36 195.07,70.61 195.07,52.7 R4.2 199.14,48.64 C4.+
N$103
  Top 0.813: R5.2 192.91,66.42 T1.1
N$104  (via drill 0.7)
  Top 0.61: 250IN.2 111.34,75.53 109.22,73.41 96.52,73.41 92.84,77.09 92.84,80.77 91.69,81.92 64.39,81.92 60.96,78.49 60.96,61.34 60.07,60.45 41.02,60.45 38.48,57.91 38.48,52.58 R12.2
  Top 0.813: R2.2 199.9,37.72 R4.1 | R1.2 173.86,76.71 172.59,77.98 v136.14,77.98
  Top 1.016: R12.2 32.89,48.13 29.59,51.44 13.46,51.44 R11.2 8.89,60.2 R14.1
  Bottom 0.406: 8.89,60.2 R14.1
  Bottom 0.813: R4.1 171.07,40.13 168.28,42.93 168.28,67.44 R1.2 | v136.14,77.98 250IN.2
N$105
  Top 1.016: R12.1 33.78,37.72 33.78,22.61 32.3,21.12 V1.9 26.91,20.3 21.72,15.11 21.72,12.93 V1.7
N$106
  Top 1.016: V1.6 6.75,15.09 1.52,20.32 1.52,38.48 R11.1
N$107
  Bottom 0.813: R8.1 T1.2 191.39,63.88 192.15,63.12 192.15,61.72 184.78,54.36 R9.2 181.74,53.34 C7.2
N$108
  Bottom 1.016: V1.1 28.41,40.17 25.53,43.05 25.53,56.64 R13.2 | D4.A 26.29,62.23 R13.2 | R13.2 19.3,59.05 C9.1
N$110
  Bottom 0.813: C7.1 176.53,81.28 169.29,88.52 169.29,91.82 R10.S
N$112
  Top 1.016: R16.2 22.23,73.28 25.02,70.48 C8.+ 35.94,85.98 R17.2
  Bottom 1.016: R14.2 18.03,70.61 R16.2 | R17.2 33.78,90.3 38.99,95.5 D6.C
N$113
  Top 1.016: R16.1 20.7,59.05 C10.1
  Bottom 1.016: R16.1 22.48,63.12 T2.3
N$114
  Bottom 1.016: T2.1 28.32,66.29 29.21,67.18 R15.2
N$115
  Top 1.016: C11.2 17.27,77.47 23.62,83.82 R17.1 | T2.2 30.61,68.2 31.5,67.31 31.5,63.12 R18.2
  Bottom 1.016: C11.2 25.53,76.07 26.92,74.68 T2.2
N$117
  Top 1.016: C11.1 17.27,85.85 23.24,91.82 R19.S
N$122  (via drill 0.5)
  Top 0.254: v146.81,45.72 139.19,45.72 138.05,44.58 120.4,44.58 v119.25,45.72
  Bottom 0.254: U$13.2 v146.81,45.72 | v119.25,45.72 U$10.27
N$123  (via drill 0.5)
  Top 0.254: v124.33,45.72 120.78,45.72 120.02,46.48 v101.98,46.48
  Bottom 0.254: U$10.2 v124.33,45.72 | v101.98,46.48 98.93,46.48 98.17,45.72 U$7.27
N$124
  Top 0.61: LED1.A JP1.8

## Text on the board
tNames: GND | GND | GND | 12v | GND | GND | GND | GND | Purdue ECE477 F2015 Team8